# Altium PCB Motors and Servos.PcbDoc
Units mm, origin at the board's own origin, x right, y up, seen from the top; angles counter-clockwise.
Board outline 98.8 x 113.8 mm, 2 copper layers (Top Layer, Bottom Layer); 58 components, 110 nets, 201 pads, 0 vias.
Unrouted connection lines stored in the file: 90.
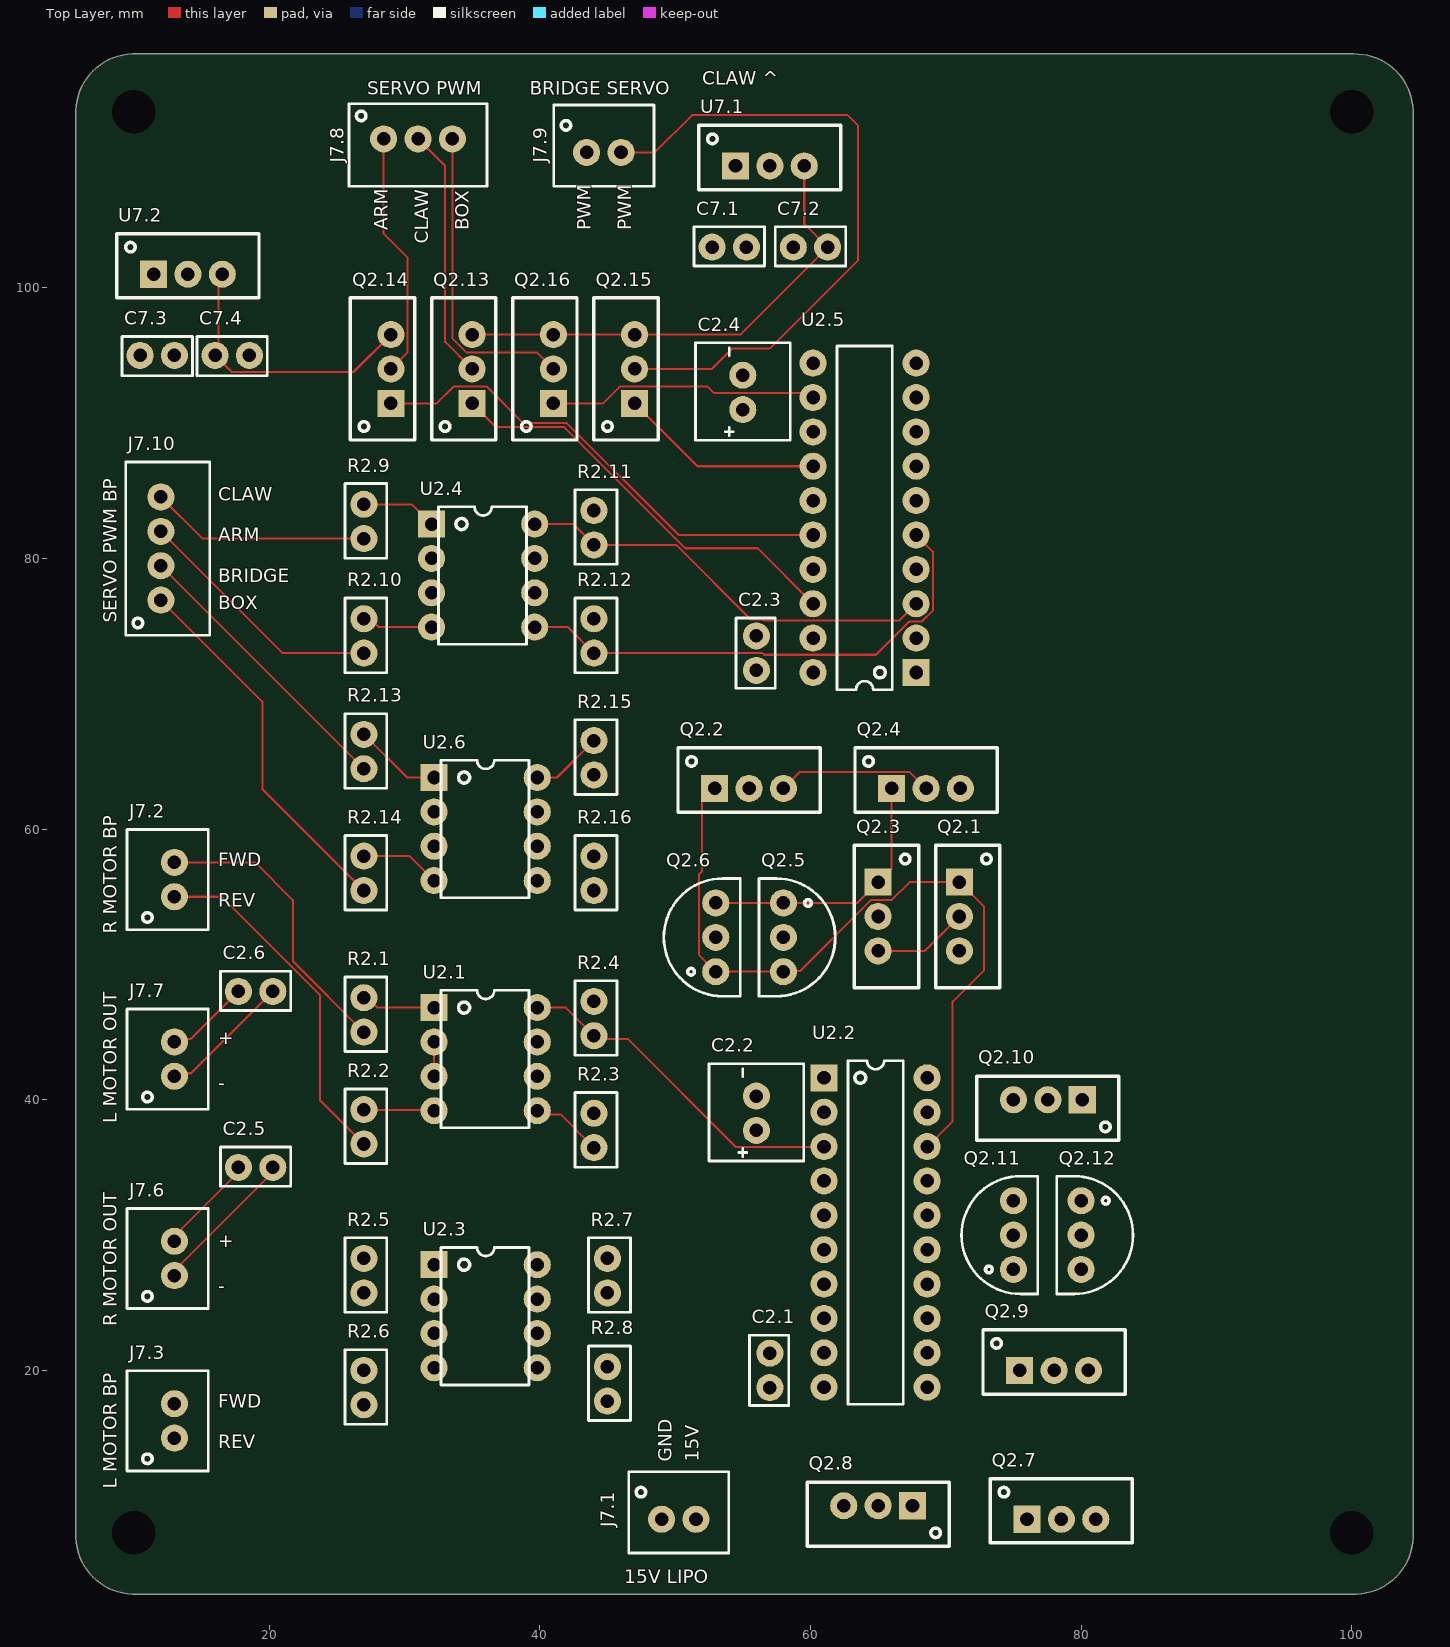
[diagram p0: Top Layer view]
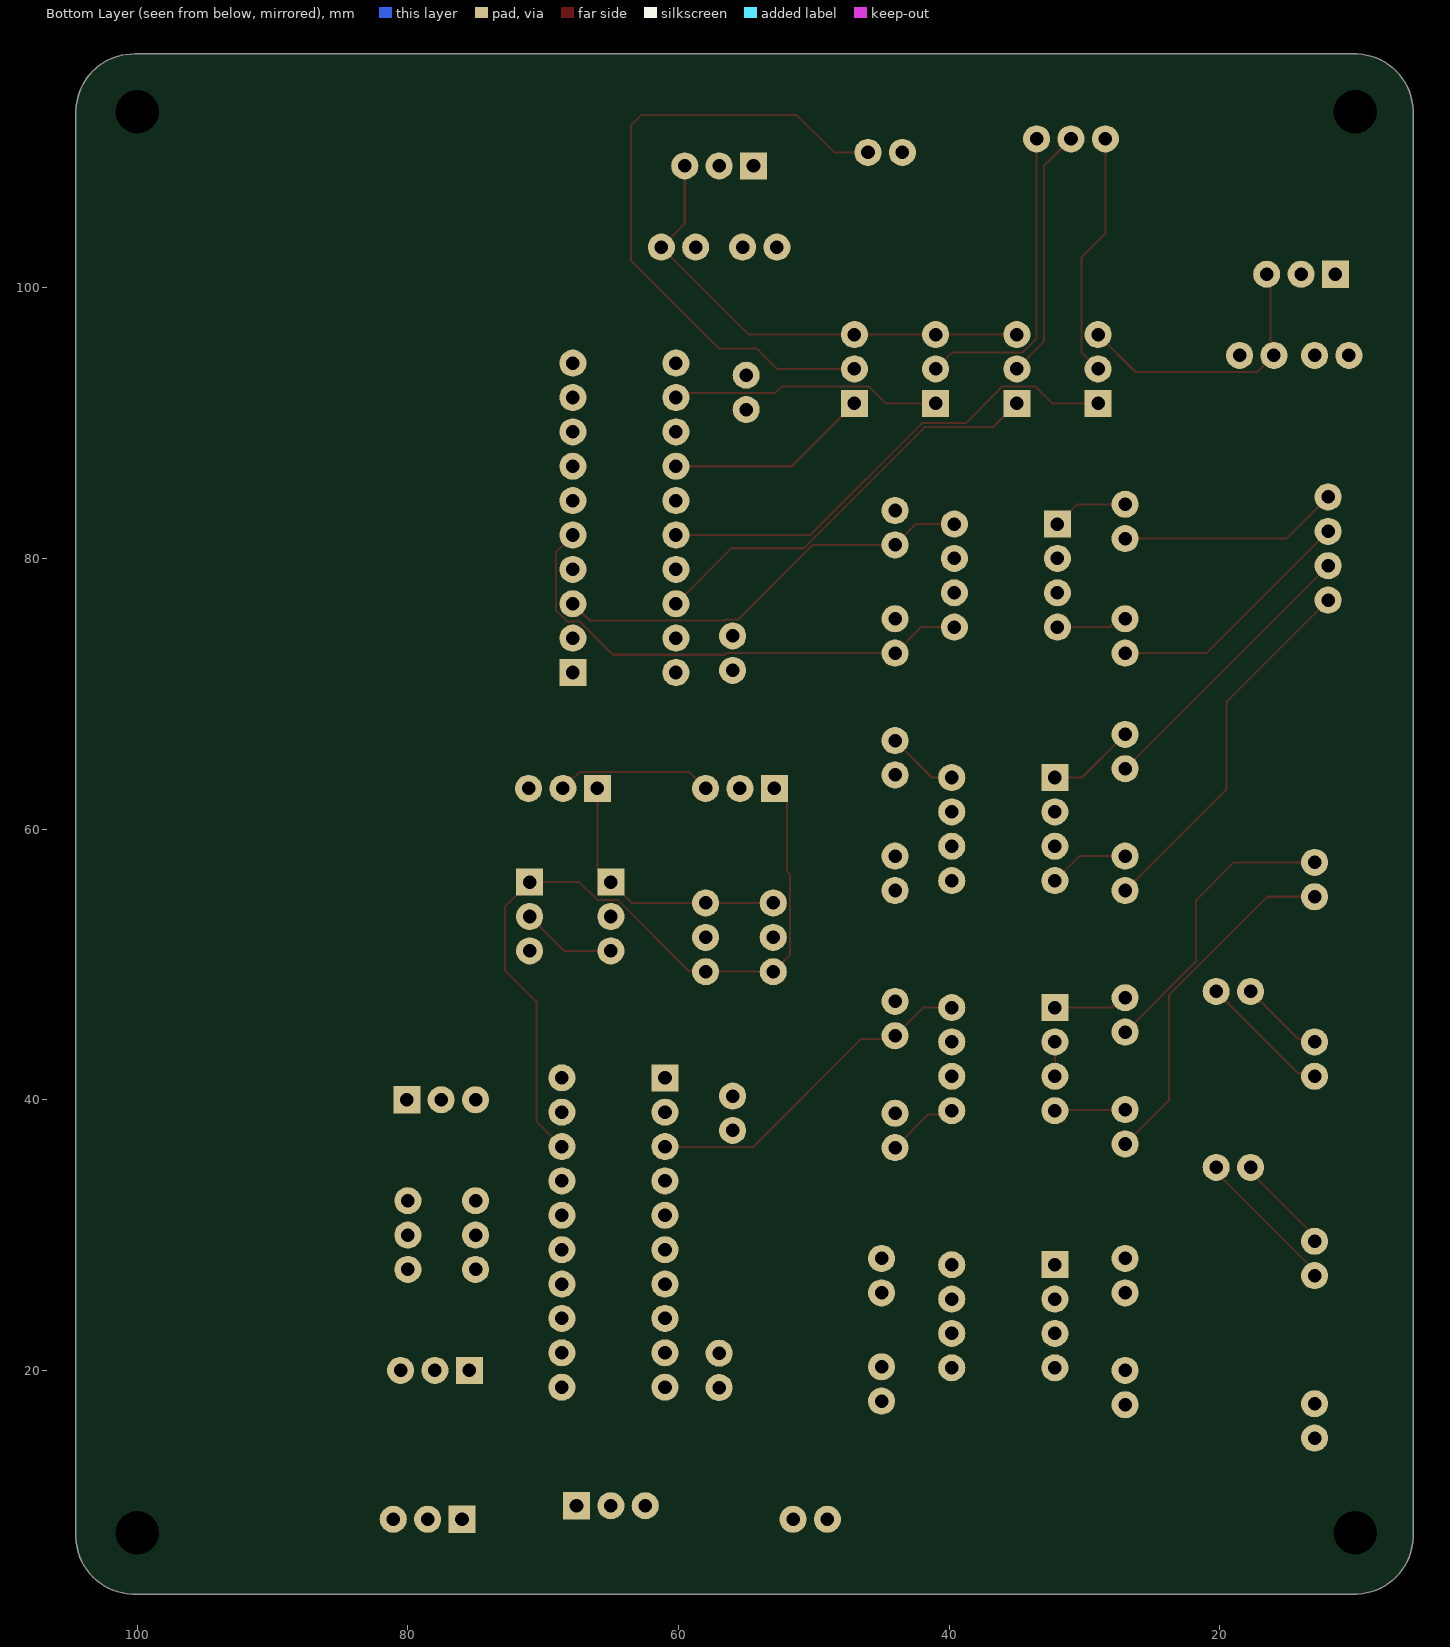
[diagram p1: Bottom Layer view, seen from below]

## Layer stack, top to bottom
Top Solder: solder mask 0.0102, Solder Resist, Dk 3.5
Top Layer: signal copper 0.0356
Dielectric 1: dielectric 0.32, FR-4, Dk 4.8
Bottom Layer: signal copper 0.0356
Bottom Solder: solder mask 0.0102, Solder Resist, Dk 3.5

## Board outline
5.725,7.626 ccw(c10,7.75) 9.876,3.475 100.372,3.475 ccw(c100.25,7.75) 104.525,7.626 104.525,113 104.524,113.124 ccw(c100.251,113.001) 100.13,117.274 100.126,117.274 9.876,117.275 ccw(c10,113) 5.725,113.124

## Design rules (kind name [scope] priority, off if disabled: settings)
BoardOutlineClearance [All] p1: gap=0.2 ignorepadtopadclearanceinfootprint=FALSE
Clearance [All] p1: gap=0.152 ignorepadtopadclearanceinfootprint=FALSE
HoleSize [All] p1: absolutevalues=TRUE maxlimit=100 minlimit=0.4 maxpercent=80.000 minpercent=20.000
PolygonConnect [All] p1: connectstyle=Relief reliefconductorwidth=0.254 reliefentries=4 polygonreliefangle="90 Angle" airgapwidth=0.254
RoutingVias [All] p1: holewidth=0.4 width=0.8 viastyle="Through Hole" minholewidth=0.4 minwidth=0.6 maxholewidth=100 maxwidth=100
SilkToSilkClearance [All] p1: silktosilkclearance=0
SilkToSolderMaskClearance [IsPad] p1: minsilkscreentomaskgap=0 clearancetoexposedcopper=TRUE
SolderMaskExpansion [All] p1: expansion=0.102 istentingtop=FALSE
Width [All] p1: maxlimit=100 minlimit=0.152 preferedwidth=0.152
27 further rules are at their usual default settings.

## Components (designator, comment, footprint, x,y, rotation, side; value= is the part's Value field where it differs from the comment)
C2.1 "100p" "Non Polarized Cap" 57,20 r90 top
C2.2 "100u" "Polarized Cap" 56,39 r90 top
C2.3 "100p" "Non Polarized Cap" 56,73 r90 top
C2.4 "100u" "Polarized Cap" 55,92.27 r90 top
C2.5 "100n" "Non Polarized Cap" 19,35 r0 top
C2.6 "100n" "Non Polarized Cap" 19,48 r0 top
C7.1 "470n" "Non Polarized Cap" 54,103 r0 top
C7.2 "100n" "Non Polarized Cap" 60,103 r0 top
C7.3 "470n" "Non Polarized Cap" 11.73,95 r180 top
C7.4 "100n" "Non Polarized Cap" 17.27,95 r180 top
J7.1 "2pos" "2pos JST" 50.27,9 r0 top
J7.2 "2pos" "2pos JST" 13,56.27 r90 top
J7.3 "2pos" "2pos JST" 13,16.27 r90 top
J7.6 "2pos" "2pos JST" 13,28.27 r90 top
J7.7 "2pos" "2pos JST" 13,43 r90 top
J7.8 "3pos" "3pos JST" 31,111 r0 top
J7.9 "2pos" "2pos JST" 44.73,110 r0 top
J7.10 "4pos" "4Pos JST" 12,80.73 r90 top
Q2.1 "IRFZ44" TO220 71,53.54 r270 top
Q2.2 "IRFZ44" TO220 55.46,63 r0 top
Q2.3 "IRFZ44" TO220 65,53.54 r270 top
Q2.4 "IRFZ44" TO220 68.54,63 r0 top
Q2.5 "VN2222LL" VN2222LL 58,52 r270 top
Q2.6 "VN2222LL" VN2222LL 53,52 r90 top
Q2.7 "IRFZ44" TO220 78.54,9 r0 top
Q2.8 "IRFZ44" TO220 65,10 r180 top
Q2.9 "IRFZ44" TO220 78,20 r0 top
Q2.10 "IRFZ44" TO220 77.54,40 r180 top
Q2.11 "VN2222LL" VN2222LL 75,30 r90 top
Q2.12 "VN2222LL" VN2222LL 80,30 r270 top
Q2.13 "IRFZ44" TO220 35,94 r90 top
Q2.14 "IRFZ44" TO220 29,94 r90 top
Q2.15 "IRFZ44" TO220 47,94 r90 top
Q2.16 "IRFZ44" TO220 41,94 r90 top
R2.1 "330" Res_Generic 27,46.27 r90 top
R2.2 "330" Res_Generic 27,38 r90 top
R2.3 "1k" Res_Generic 44,37.73 r90 top
R2.4 "1k" Res_Generic 44,46 r90 top
R2.5 "330" Res_Generic 27,27 r90 top
R2.6 "330" Res_Generic 27,18.73 r90 top
R2.7 "1k" Res_Generic 45,27 r90 top
R2.8 "1k" Res_Generic 45,19 r90 top
R2.9 "330" Res_Generic 27,82.73 r90 top
R2.10 "330" Res_Generic 27,74.27 r90 top
R2.11 "1k" Res_Generic 44,82.27 r90 top
R2.12 "1k" Res_Generic 44,74.27 r90 top
R2.13 "330" Res_Generic 27,65.73 r90 top
R2.14 "330" Res_Generic 27,56.73 r90 top
R2.15 "1k" Res_Generic 44,65.27 r90 top
R2.16 "1k" Res_Generic 44,56.73 r90 top
U2.1 "MCT6" DIP8 36,43 r0 top
U2.2 "LT1161IN" DIP20 64.81,30.19 r0 top
U2.3 "MCT6" DIP8 36,24 r0 top
U2.4 "MCT6" DIP8 35.81,78.73 r0 top
U2.5 "LT1161IN" DIP20 64,83 r180 top
U2.6 "MCT6" DIP8 36,60 r0 top
U7.1 "5V SNS" TO220 57,109 r0 top
U7.2 "5V SNS" TO220 14,101 r0 top

## Footprints (in the part's own frame and the unit in brackets; to place one, negate y for a bottom-side part, rotate by r counter-clockwise, add the part's x,y. Pads: shape width x height; smd on the part's side, far side on the other; paste and mask are expansions set on the pad)
"2pos JST" [mm]
  round 2 hole 1: 1(-1.27,0) 2(1.27,0)
  silkscreen extent -3.7,-2.5 3.7,3.5, body extent -3.7,-2.4 3.7,3.35, height 7.01
"3pos JST" [mm]
  round 2 hole 1: 1(-2.54,0) 2(0,0) 3(2.54,0)
  silkscreen extent -5.1,-3.5 5.1,2.6, body extent -4.95,-3.35 4.95,2.4, height 7
"4Pos JST" [mm]
  round 2 hole 1: 1(-3.81,0) 2(-1.27,0) 3(1.27,0) 4(3.81,0)
  silkscreen extent -6.4,-3.6 6.4,2.6, body extent -6.2,-3.38 6.2,2.37, height 7.01
DIP8 [mm]
  rect 2x2 hole 1: 1(-3.81,3.81)
  round 2 hole 1: 2(-3.81,1.27) 3(-3.81,-1.27) 4(-3.81,-3.81) 5(3.81,-3.81) 6(3.81,-1.27) 7(3.81,1.27) 8(3.81,3.81)
  silkscreen extent -3.3,-5.08 3.2,5.08, body extent -3.96,-4.79 3.91,4.79, height 5.33
DIP20 [mm]
  rect 2x2 hole 1: 1(-3.81,11.43)
  round 2 hole 1: 2(-3.81,8.89) 3(-3.81,6.35) 4(-3.81,3.81) 5(-3.81,1.27) 6(-3.81,-1.27) 7(-3.81,-3.81) 8(-3.81,-6.35) 9(-3.81,-8.89) 10(-3.81,-11.43) 11(3.81,-11.43) 12(3.81,-8.89) 13(3.81,-6.35) 14(3.81,-3.81) 15(3.81,-1.27) 16(3.81,1.27) 17(3.81,3.81) 18(3.81,6.35) 19(3.81,8.89) 20(3.81,11.43)
  silkscreen extent -2.04,-12.7 2.04,12.7, body extent -4.09,-13.39 4.04,13.53, height 3.81
"Non Polarized Cap" [mm] "Cap Generic THT"
  round 2 hole 1: 1(-1.27,0) 2(1.27,0)
  silkscreen extent -2.6,-1.4 2.6,1.5, body extent -2,-1.2 2,1.3, height 6
"Polarized Cap" [mm]
  round 2 hole 1: 1(-1.27,0) 2(1.27,0)
  silkscreen extent -3.53,-3.5 3.66,3.5, body extent -3.25,-3.22 3.25,3.28, height 11.37
Res_Generic [mm] "Cap Generic THT Footprint"
  round 2 hole 1: 1(-1.27,0) 2(1.27,0)
  silkscreen extent -2.71,-1.7 2.8,1.4, body extent -1.47,-1.3 2.4,1, height 8.18
TO220 [mm]
  rect 2x2 hole 1: 1(-2.54,0)
  round 2 hole 1: 2(0,0) 3(2.54,0)
  silkscreen extent -5.25,-1.75 5.25,3, body extent -5.08,-1.66 5.08,2.91, height 19.6
VN2222LL [mm]
  round 2 hole 1: 1(-2.54,0) 2(0,0) 3(2.54,0)
  silkscreen extent -4.35,-1.8 4.35,3.83, body extent -2.78,-1.28 2.78,2.4, height 7.82

## Part data
C2.1 C2.3 C2.5 C2.6 C7.1 C7.2 C7.3 C7.4: library part Cap_Generic
C2.2 C2.4: library part "Polarized Cap"
J7.1 J7.2 J7.3 J7.6 J7.7 J7.9: library part "2pos Conn", "2pos Conn JST"
J7.8: library part "3pos Conn", "3pos Conn"
J7.10: library part "4pos Conn", "4pos Conn"
Q2.1 Q2.2 Q2.3 Q2.4 Q2.7 Q2.8 Q2.9 Q2.10 Q2.13 Q2.14 Q2.15 Q2.16: library part "IRFZ44 NMOS", "IRFZ44EPBF N-Channel 60 V 48A 110W Through Hole TO-220AB", Supplier Part Number 1=IRFZ44ZLPBF-ND, Supplier 1=Digi-Key
Q2.5 Q2.6 Q2.11 Q2.12: library part "VN2222LL NMOS", "VN2222LL N-Channel 60 V 150mA 400mW Through Hole TO-92 (TO-226)", Supplier Part Number 1=689-VN2222LL-G, Supplier 1=Mouser
R2.1 R2.2 R2.3 R2.4 R2.5 R2.6 R2.7 R2.8 R2.9 R2.10 R2.11 R2.12 R2.13 R2.14 R2.15 R2.16: library part Res_Generic
U2.1 U2.3 U2.4 U2.6: library part "MCT6 Optocoupler", "Optoisolator 5.3KV 2CH TRANS 8-DIP", Supplier Part Number 1=512-MCT6, Supplier 1=Mouser
U2.2 U2.5: library part "LT1161IN Gate Driver", "LT1161IN High-Side Gate Driver IC Non-Inverting 20-PDIP", Supplier Part Number 1=LT1161IN#PBF-ND, Supplier 1=Digi-Key
U7.1 U7.2: library part "UA7805 5V Reg", "UA7805 IC REG LINEAR 5V 1.5A TO220-3", Supplier Part Number 1=296-39515-5-ND, Supplier 1=Digi-Key

## Free pads (board coordinates)
  round 0 hole 3.2: ""(10,8) ""(10,113) ""(100,8) ""(100,113)

## Nets (pads, with @x,y where several pads share a name; then routed paths per layer and width w, separated by ;. In a path a pad name is that pad's centre, name@x,y a point inside that pad or via, vN(x,y) a via of type N, cw(c..) or ccw(c..) an arc to the next point about the centre after c; other vN are vias at no path point)
3.3V_BP: 
3.3V_P: 
5V_ARM: C7.4.2 Q2.14.3 U7.2.3 | length 20.9
  Top Layer w0.152: U7.2.3 16.27,100.73 16.27,95.27 C7.4.2 17.229,93.771 26.231,93.771 Q2.14.3
5V_P: 
5V_SERVO: C7.2.2 Q2.13.3 Q2.15.3 Q2.16.3 U7.1.3 | length 35.7
  Top Layer w0.152: Q2.13.3 Q2.16.3 Q2.15.3 54.81,96.54 C7.2.2 59.54,104.73 U7.1.3
5V_XTRA: 
8V: 
15V: C2.1.1 C2.2.1 C2.3.1 C2.4.1 C7.1.2 C7.3.2 J7.1.2 Q2.1.3 Q2.4.3 Q2.7.3 Q2.8.3 U2.1.6 U2.1.7 U2.2.11 U2.2.13 U2.2.15 U2.2.17 U2.2.19 U2.2.20 U2.3.6 U2.3.7 U2.4.6 U2.4.7 U2.5.11 U2.5.13 U2.5.15 U2.5.17 U2.5.19 U2.5.20 U2.6.6 U2.6.7 U7.1.1 U7.2.1
ARM_SERV_BP_IN: J7.10.3 R2.10.1 | length 18.7
  Top Layer w0.152: J7.10.3 21,73 R2.10.1
ARM_SERV_BP_OUT: 
ARM_SERV_PWM: J7.8.1 Q2.14.2 | length 18.2
  Top Layer w0.152: J7.8.1 28.46,103.999 30.229,102.23 30.229,95.229 Q2.14.2
BOX_SERV_BP_IN: J7.10.1 R2.14.1 | length 27.7
  Top Layer w0.152: J7.10.1 19.5,69.42 19.5,62.96 R2.14.1
BOX_SERV_BP_OUT: 
BOX_SERV_PWM: J7.8.3 Q2.16.2 | length 23.1
  Top Layer w0.152: J7.8.3 33.54,96.262 34.574,95.229 39.771,95.229 Q2.16.2
BRIDGE_SERV_BP_IN: J7.10.2 R2.13.1 | length 21.2
  Top Layer w0.152: J7.10.2 R2.13.1
BRIDGE_SERV_BP_OUT: 
BRIDGE_SERV_PWM: J7.9.1 J7.9.2 Q2.15.2 | length 48.8
  Top Layer w0.152: J7.9.2 48.5,110 51.25,112.75 62.75,112.75 63.5,112 63.5,102 57,95.5 54.201,95.5 52.701,94 Q2.15.2
CLAW_SERV_BP_IN: J7.10.4 R2.9.1 | length 16.3
  Top Layer w0.152: J7.10.4 15.08,81.46 R2.9.1
CLAW_SERV_BP_OUT: 
CLAW_SERV_PWM: J7.8.2 Q2.13.2 | length 18.7
  Top Layer w0.152: J7.8.2 33,109 33,96 Q2.13.2
DCLK: 
DIO: 
ECHO_F_M: 
ECHO_S_L: 
ECHO_S_R: 
ECHO_SPARE: 
ENCODER_L: 
ENCODER_R: 
IR_LEFT_TRANS: 
IR_RIGHT_TRANS: 
IR_SNS_LEFT: 
IR_SNS_RIGHT: 
LEFT+: C2.6.1 J7.7.2 Q2.7.2 Q2.9.3 | length 6.3
  Top Layer w0.152: J7.7.2 13.229,44.499 14.229,44.499 C2.6.1
LEFT-: C2.6.2 J7.7.1 Q2.8.2 Q2.10.3 | length 9.9
  Top Layer w0.152: J7.7.1 13.229,41.959 14.229,41.959 C2.6.2
LEFT_FWD: Q2.7.1 Q2.10.1 Q2.11.3 Q2.12.1 U2.2.14
LEFT_FWD_BP_IN: J7.3.2 R2.5.1
LEFT_FWD_BP_OUT: 
LEFT_REV: Q2.8.1 Q2.9.1 Q2.11.1 Q2.12.3 U2.2.12
LEFT_REV_BP_IN: J7.3.1 R2.6.1
LEFT_REV_BP_OUT: 
M_GND: C2.1.2 C2.2.2 C2.3.2 C2.4.2 C7.1.1 C7.2.1 C7.3.1 C7.4.1 J7.1.1 Q2.2.2 Q2.3.2 Q2.5.2 Q2.6.2 Q2.9.2 Q2.10.2 Q2.11.2 Q2.12.2 R2.3.2 R2.4.2 R2.7.1 R2.8.1 R2.11.2 R2.12.2 R2.15.1 R2.16.2 U2.2.1 U2.2.10 U2.5.1 U2.5.10 U7.1.2 U7.2.2
MAGNET_SNS: 
NetC1.1_1: 
NetC1.1_2: 
NetC1.2_1: 
NetC1.2_2: 
NetC4.1_2: 
NetQ2.13_1: Q2.13.1 U2.5.18 | length 31.3
  Top Layer w0.152: Q2.13.1 36.765,89.695 41.805,89.695 50.75,80.75 56.09,80.75 U2.5.18
NetQ2.14_1: Q2.14.1 U2.5.16 | length 36.2
  Top Layer w0.152: Q2.14.1 32.395,91.46 33.624,92.689 36.095,92.689 38.783,90 42,90 50.27,81.73 U2.5.16
NetQ2.15_1: Q2.15.1 U2.5.14 | length 15.1
  Top Layer w0.152: Q2.15.1 51.65,86.81 U2.5.14
NetQ2.16_1: Q2.16.1 U2.5.12 | length 20
  Top Layer w0.152: Q2.16.1 44.677,91.46 45.905,92.689 52.398,92.689 52.858,92.229 59.851,92.229 U2.5.12
NetR1.12_1: 
NetR1.14_2: 
NetR1.17_1: 
NetR1.19_2: 
NetR1.23_2: 
NetR1.24_2: 
NetR1.26_2: 
NetR1.28_2: 
NetR1.30_2: 
NetR2.1_2: R2.1.2 U2.1.1 | length 5.5
  Top Layer w0.152: R2.1.2 27.277,47.54 28.007,46.81 U2.1.1
NetR2.2_2: R2.2.2 U2.1.4 | length 5.2
  Top Layer w0.152: R2.2.2 27.04,39.23 32.15,39.23 U2.1.4
NetR2.3_1: R2.3.1 U2.1.5 U2.2.5 | length 5.3
  Top Layer w0.152: U2.1.5 40.079,38.921 41.539,38.921 R2.3.1
NetR2.4_1: R2.4.1 U2.1.8 U2.2.3 | length 25.5
  Top Layer w0.152: U2.1.8 41.92,46.81 R2.4.1 44.23,44.5 46.5,44.5 54.499,36.501 60.961,36.501 U2.2.3
NetR2.5_2: R2.5.2 U2.3.1
NetR2.6_2: R2.6.2 U2.3.4
NetR2.7_2: R2.7.2 U2.2.7 U2.3.8
NetR2.8_2: R2.8.2 U2.2.9 U2.3.5
NetR2.9_2: R2.9.2 U2.4.1 | length 5.6
  Top Layer w0.152: R2.9.2 30.54,84 U2.4.1
NetR2.10_2: R2.10.2 U2.4.4 | length 5.3
  Top Layer w0.152: R2.10.2 27.498,75.54 28.118,74.92 U2.4.4
NetR2.11_1: R2.11.1 U2.4.8 U2.5.3 | length 31.6
  Top Layer w0.152: U2.4.8 42.46,82.54 R2.11.1 50.069,81 55.57,75.499 56.509,75.499 56.586,75.421 66.581,75.421 U2.5.3
NetR2.12_1: R2.12.1 U2.4.5 U2.5.5 | length 37.7
  Top Layer w0.152: U2.4.5 42.08,74.92 R2.12.1 56.468,73 56.586,72.881 64.844,72.881 67.301,75.339 68.236,75.339 69.039,76.141 69.039,80.501 U2.5.5
NetR2.13_2: R2.13.2 U2.6.1 | length 6.5
  Top Layer w0.152: R2.13.2 30.19,63.81 U2.6.1
NetR2.14_2: R2.14.2 U2.6.4 | length 5.9
  Top Layer w0.152: R2.14.2 30.38,58 U2.6.4
NetR2.15_2: R2.15.2 U2.5.7 U2.6.8 | length 5.3
  Top Layer w0.152: U2.6.8 41.27,63.81 R2.15.2
NetR2.16_1: R2.16.1 U2.5.9 U2.6.5
P_GND: U2.1.2 U2.1.3 U2.3.2 U2.3.3 U2.4.2 U2.4.3 U2.6.2 U2.6.3 | length 2.5
  Top Layer w0.152: U2.1.3 U2.1.2
REF_F_L_COL: 
REF_F_L_LED: 
REF_F_L_SNS: 
REF_F_R_COL: 
REF_F_R_LED: 
REF_F_R_SNS: 
REF_R_COL: 
REF_R_LED: 
REF_R_SNS: 
REF_S_L_COL: 
REF_S_L_LED: 
REF_S_L_SNS: 
REF_S_R_COL: 
REF_S_R_LED: 
REF_S_R_SNS: 
RIGHT+: C2.5.1 J7.6.2 Q2.1.2 Q2.3.3 | length 14.5
  Top Layer w0.152: J7.6.2 13,29.905 17.73,34.635 C2.5.1 ; Q2.3.3 68.46,51 Q2.1.2
RIGHT-: C2.5.2 J7.6.1 Q2.2.3 Q2.4.2 | length 22.6
  Top Layer w0.152: J7.6.1 13,27.365 20.27,34.635 C2.5.2 ; Q2.2.3 59.229,64.229 67.311,64.229 Q2.4.2
RIGHT_FWD: Q2.1.1 Q2.2.1 Q2.5.3 Q2.6.1 U2.2.18 | length 57.3
  Top Layer w0.152: Q2.2.1 51.996,62.076 51.996,56.896 51.771,56.671 51.771,50.689 Q2.6.1 Q2.5.3 58.046,49.506 59.229,49.506 64.491,54.769 66.012,54.769 67.323,56.08 Q2.1.1 72.83,54.25 72.83,49.58 70.5,47.25 70.5,38.42 U2.2.18
RIGHT_FWD_BP_IN: J7.2.2 R2.1.1 | length 21.8
  Top Layer w0.152: J7.2.2 18.96,57.54 21.75,54.75 21.75,50.25 R2.1.1
RIGHT_FWD_BP_OUT: 
RIGHT_REV: Q2.3.1 Q2.4.1 Q2.5.1 Q2.6.3 U2.2.16 | length 20
  Top Layer w0.152: Q2.6.3 Q2.5.1 63.46,54.54 Q2.3.1 66,57.08 Q2.4.1
RIGHT_REV_BP_IN: J7.2.1 R2.2.1 | length 26.1
  Top Layer w0.152: J7.2.1 16.5,55 23.75,47.75 23.75,39.98 R2.2.1
RIGHT_REV_BP_OUT: 
SPARE_1: 
SPARE_2: 
SPARE_3: 
SW_CLAW_+: 
SW_CLAW_SNS: 
SW_FRONT_+: 
SW_FRONT_SNS: 
SW_REAR_+: 
SW_REAR_SNS: 
TRIG_COM: 
pads on no net: U2.2.2 U2.2.4 U2.2.6 U2.2.8 U2.5.2 U2.5.4 U2.5.6 U2.5.8

## Silkscreen, mask and mechanical layers (free items; w line width, h text height)
Top Overlay:
  text "CLAW ^" at 52,115 h1
  text "SERVO PWM" at 27.254,114.254 h1
  text "BRIDGE SERVO" at 39.254,114.254 h1
  text "ARM" at 28.746,104.254 h1 r90
  text "BOX" at 34.746,104.254 h1 r90
  text "PWM" at 43.746,104.254 h1 r90
  text "PWM" at 46.746,104.254 h1 r90
  text "CLAW" at 31.746,103.254 h1 r90
  text "CLAW" at 16.254,84.254 h1
  text "ARM" at 16.254,81.254 h1
  text "BRIDGE" at 16.254,78.254 h1
  text "BOX" at 16.254,76.254 h1
  text "SERVO PWM BP" at 8.746,75.254 h1 r90
  text "FWD" at 16.254,57.254 h1
  text "REV" at 16.254,54.254 h1
  text "R MOTOR BP" at 8.746,52.254 h1 r90
  text "+" at 16.254,44.087 h1
  text "-" at 16.254,40.754 h1
  text "L MOTOR OUT" at 8.746,38.254 h1 r90
  text "+" at 16.254,29.087 h1
  text "-" at 16.254,25.754 h1
  text "R MOTOR OUT" at 8.746,23.254 h1 r90
  text "FWD" at 16.254,17.254 h1
  text "REV" at 16.254,14.254 h1
  text "GND" at 49.746,13.254 h1 r90
  text "15V" at 51.746,13.254 h1 r90
  text "L MOTOR BP" at 8.746,11.254 h1 r90
  text "15V LIPO" at 46.254,4.254 h1
Mechanical 1:
  lines w0.2: 5.625,112.875 cw(c10,113) 9.875,117.375 100.126,117.374 cw(c100.251,113.001) 104.624,113.126 104.625,113.125 ; 5.625,113.125 5.625,7.625 ccw(c10,7.75) 10.125,3.375 ; 9.875,3.375 100.625,3.375 ; 100.375,3.375 ccw(c100.25,7.75) 104.625,7.875 ; 104.625,7.375 104.625,113